# Altium PCB PCB1.PcbDoc (part 1 of 3)
Units mm, origin at the board's own origin, x right, y up, seen from the top; angles counter-clockwise.
Board outline 297.31 x 194.82 mm, 2 copper layers (Top Layer, Bottom Layer); 61 components, 34 nets, 159 pads, 65 vias.
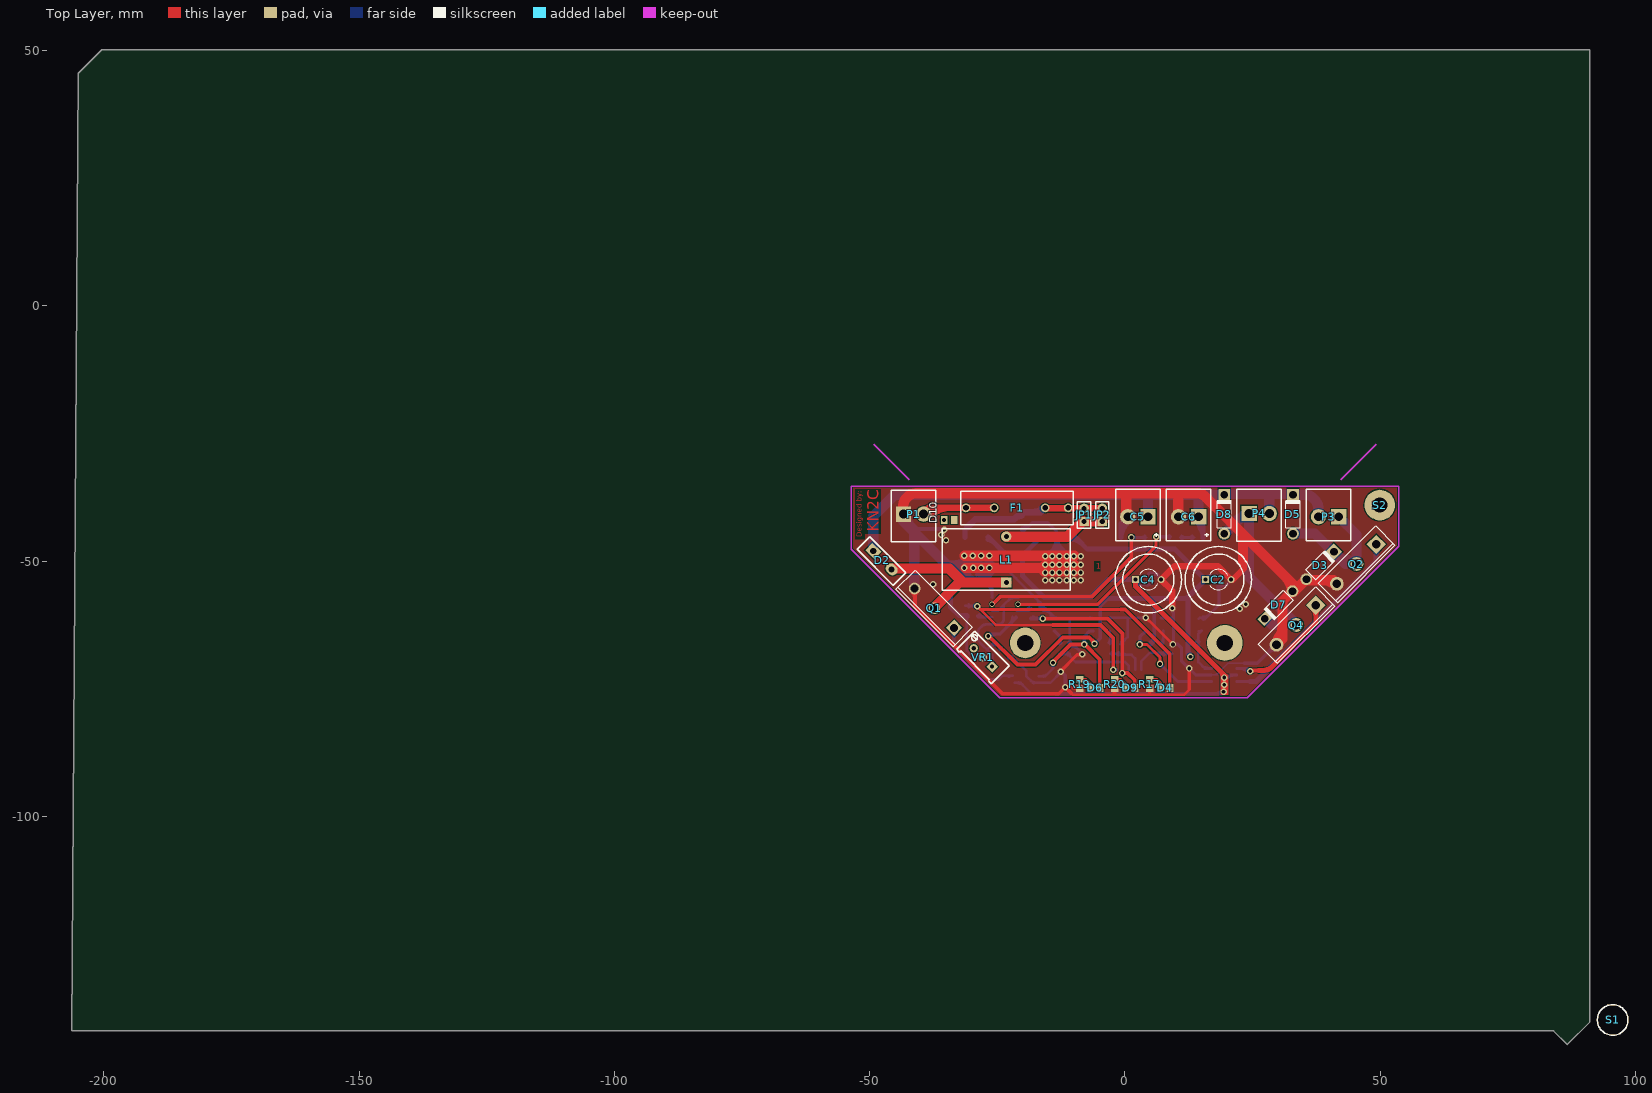
[diagram p0: Top Layer view]
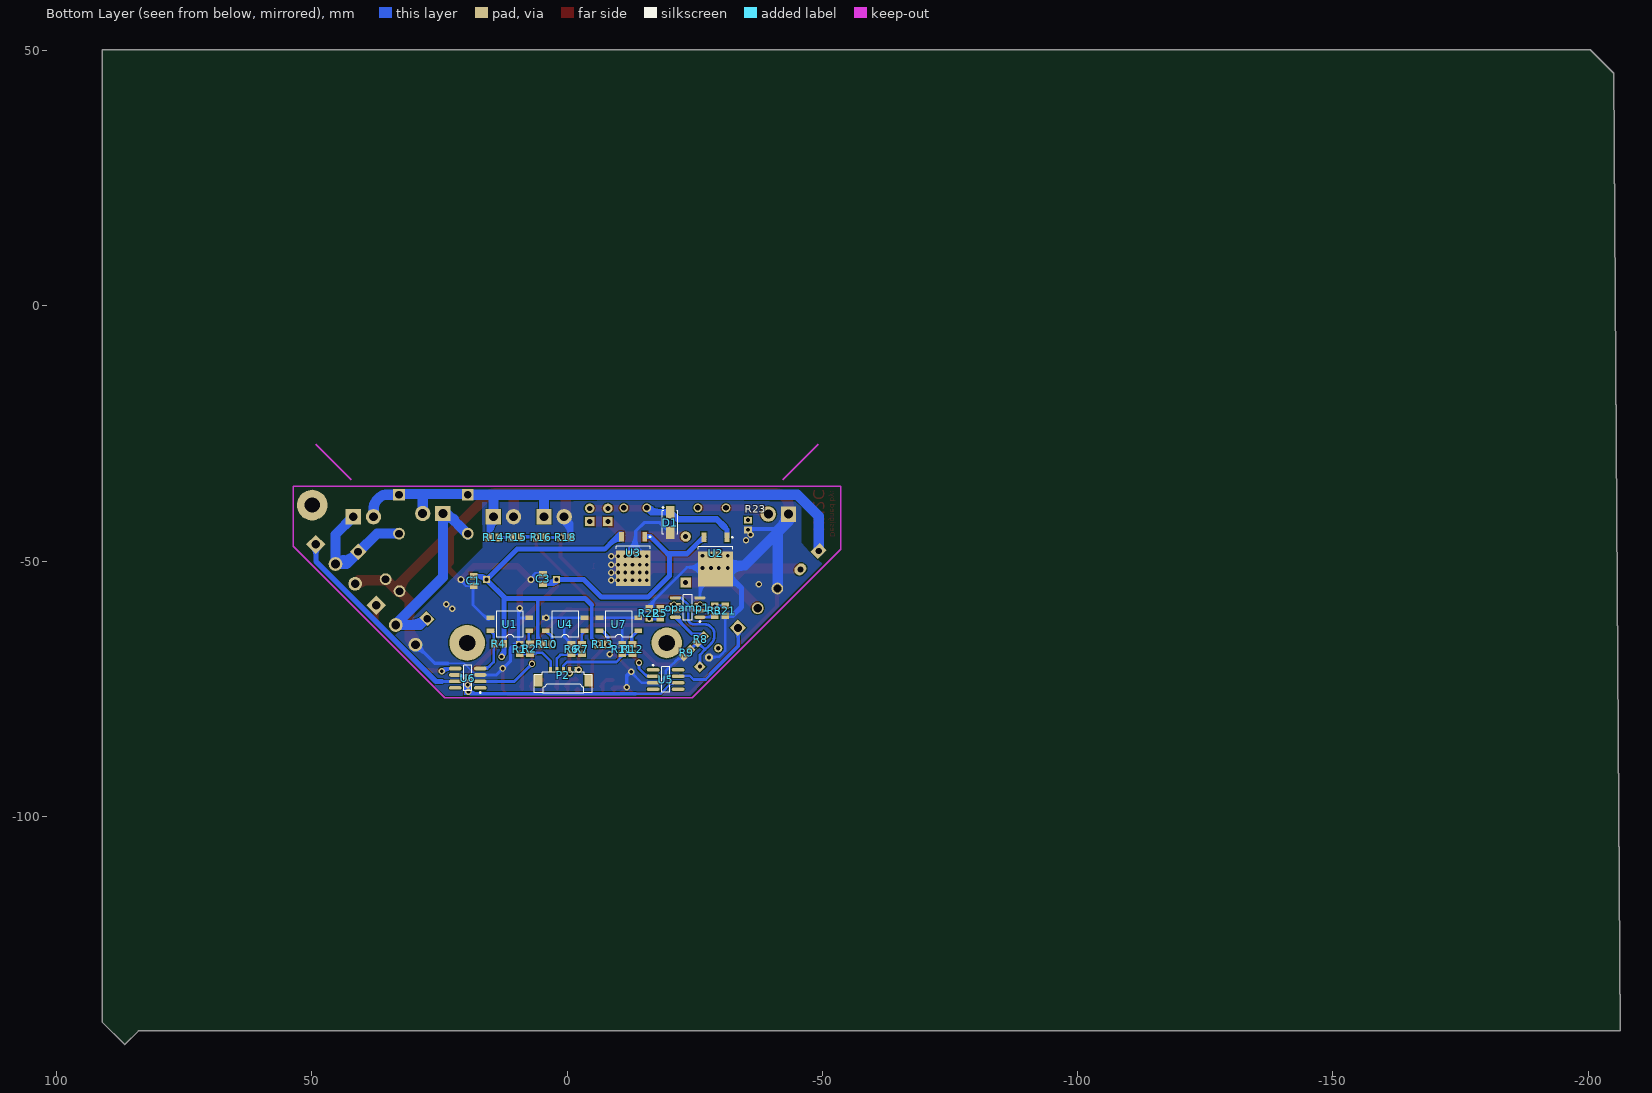
[diagram p1: Bottom Layer view, seen from below]

## Layer stack, top to bottom
Top Layer: signal copper 0.0356
Dielectric: dielectric 0.32, FR-4, Dk 4.8
Bottom Layer: signal copper 0.0356

## Board outline
-204.978,45.593 -200.406,50.165 91.059,50.165 91.059,-140.208 86.614,-144.653 83.947,-141.986 -206.248,-141.986

## Design rules (kind name [scope] priority, off if disabled: settings)
Clearance [All] p1: gap=0.2
FabricationTestpoint [(IsPad And (OnTopLayer Or OnBottomLayer))] p1: side=3 testpointundercomponent=TRUE minsize=1.016 maxsize=2.54 preferedsize=1.524 minholesize=0 maxholesize=1.016 preferedholesize=0.813 testpointgrid=0.025 allowsidetop=TRUE allowsidebottom=TRUE usegrid=TRUE gridtolerance=0
PlaneClearance [All] p1: clearance=0.5
PolygonConnect [All] p1: connectstyle=Direct reliefconductorwidth=0.254 reliefentries=4 polygonreliefangle="90 Angle" airgapwidth=0.254
RoutingVias [All] p1: holewidth=0.711 width=1.27 viastyle="Through Hole" minholewidth=0.5 minwidth=1 maxholewidth=0.711 maxwidth=1.27
SolderMaskExpansion [All] p1: expansion=0.102
Width Width_1 [All] p1: maxlimit=2 minlimit=2539.975 preferedwidth=1 toplayer_minwidth=0 bottomlayer_minwidth=0 minimp=50.000000 maximp=50.000000 favimp=50.000000
26 further rules are at their usual default settings.

## Components (designator, comment, footprint, x,y, rotation, side; value= is the part's Value field where it differs from the comment)
C1 "Cap_UP" 2012[0805] 18.288,-53.848 r90 bottom
C2 "Cap_El" EL_M 18.288,-53.594 r0 top
C3 "Cap_UP" 2012[0805] 4.699,-53.467 r270 bottom
C4 "Cap_El" EL_M 4.572,-53.594 r0 top
C5 "Cap_El_200V" CAP 2.54,-41.275 r270 top
C6 "Cap_El_200V" CAP 12.446,-41.275 r270 top
D1 "Diode" US1M -20.193,-42.418 r90 bottom
D2 "Diode_ShotKey" "TO-220A - duplicate" -47.498,-49.784 r45 top
D3 "Diode" DIO10.46-5.3X2.8#1 38.227,-50.8 r45 top
D4 "Diode" 2012[0805] 7.874,-74.803 r180 top
D5 "Diode" DIO10.46-5.3X2.8#1 32.893,-40.767 r90 top
D6 "Diode" 2012[0805] -5.842,-74.803 r180 top
D7 "Diode" DIO10.46-5.3X2.8#2 30.099,-58.547 r225 top
D8 "Diode" DIO10.46-5.3X2.8#1 19.431,-40.767 r90 top
D9 "Diode" 2012[0805] 1.016,-74.803 r180 top
D10 "Diode" 2012[0805] -34.417,-41.91 r180 top
F1 "Fuse" "fuse new" -32.639,-42.799 r0 top
JP1 "JUMPER" JPR -8.001,-40.894 r90 top
JP2 "JUMPER" JPR -4.445,-40.894 r90 top
L1 "Inductor" Mh2 -23.241,-49.657 r90 top
opamp1 "LM358" "8 pin SOIC_N" -23.622,-59.055 r0 bottom
P1 "Header 2B" BHDR1X2 -41.402,-40.767 r90 top
P2 "Header 5" "SHEADER 5" -1.778,-71.247 r0 bottom locked
P3 "Header 2B" BHDR1X2 39.878,-41.275 r270 top
P4 "Header 2B" BHDR1X2 26.289,-40.64 r90 top
Q1 "MOSFET-N" TO247#1 -37.338,-59.182 r135 top
Q2 "MOSFET-N" TO247#2 45.339,-50.546 r225 top
Q4 "MOSFET-N" TO247#2 33.528,-62.484 r225 top
R1 "Res" 2012[0805] 9.283,-67.183 r90 bottom
R2 "Res" 2012[0805] 7.251,-67.158 r270 bottom
R3 "Res" 2012[0805] -28.956,-59.69 r90 bottom
R4 "Res" 2012[0805] 13.335,-66.167 r180 bottom
R5 "Res" 2012[0805] -18.288,-60.198 r90 bottom
R6 "Res" 2012[0805] -0.889,-67.183 r90 bottom
R7 "Res" 2012[0805] -2.921,-67.183 r270 bottom
R8 "Res" 2012[0805] -26.162,-65.278 r135 bottom
R9 "Res" 2012[0805] -23.495,-67.945 r135 bottom
R10 "Res" 2012[0805] 3.937,-66.294 r0 bottom
R11 "Res" 2012[0805] -10.795,-67.183 r90 bottom
R12 "Res" 2012[0805] -12.827,-67.183 r270 bottom
R13 "Res" 2012[0805] -6.985,-66.294 r0 bottom
R14 "Res" 2012[0805] 14.351,-45.339 r180 bottom
R15 "Res" 2012[0805] 9.906,-45.339 r0 bottom
R16 "Res" 2012[0805] 5.08,-45.339 r0 bottom
R17 "Res" 2012[0805] 4.826,-74.041 r90 top
R18 "Res" 2012[0805] 0.254,-45.339 r0 bottom
R19 "Res" 2012[0805] -8.89,-74.041 r90 top
R20 "Res" 2012[0805] -2.032,-74.041 r90 top
R21 "Res" 2012[0805] -30.988,-59.69 r270 bottom
R22 "Res" 2012[0805] -16.129,-60.198 r90 bottom
R23 "Res" 2012[0805] -35.433,-42.926 r90 bottom
S1 "Screw Hole" "Screw Holw 3-6 mm"#1 95.504,-139.827 r0 top
S2 "Screw Hole" "Screw Holw 3-6 mm"#2 55.626,-42.037 r180 top
U1 "OptoCoupler" opto_smd 11.176,-62.357 r180 bottom
U2 "7812" D-PACK -29.083,-49.657 r270 bottom
U3 "7805" D-PACK -12.954,-49.53 r270 bottom
U4 "OptoCoupler" opto_smd 0.381,-62.357 r180 bottom locked
U5 "TC4428" SO-8_M -19.304,-73.152 r180 bottom
U6 "TC4429" SO-8_M 19.431,-72.898 r0 bottom
U7 "OptoCoupler" opto_smd -10.16,-62.357 r180 bottom locked
VR1 "Res Tap" MULTITURN -27.813,-68.834 r135 top

## Footprints (in the part's own frame and the unit in brackets; to place one, negate y for a bottom-side part, rotate by r counter-clockwise, add the part's x,y. Pads: shape width x height; smd on the part's side, far side on the other; paste and mask are expansions set on the pad)
"8 pin SOIC_N" [mm] "8-Pin Small Outline Integrated Circuit 1.27 mm Pitch, IPC Medium Density"
  oval 2.2x0.6 smd: 1(-2.4,1.905) 2(-2.4,0.635) 3(-2.4,-0.635) 4(-2.4,-1.905) 5(2.4,-1.905) 6(2.4,-0.635) 7(2.4,0.635) 8(2.4,1.905)
  silkscreen extent -2.52,-2.5 0.9,2.88, body extent -1.95,-2.45 1.95,2.45, height 1.91
2012[0805] [mm] "Chip Resistor; Body 2.0 x 1.3 mm (LxW typ)"
  rect 1.3x1.5 smd: 1(-0.95,0) 2(0.95,0)
  body extent -1.22,-0.75 1.28,0.75, height 0.5
BHDR1X2 [mm]
  rect 3x3 hole 1.75: 1(0,1.98)
  round 3 hole 1.75: 2(0,-1.98)
  silkscreen extent -5.4,-4.36 4.7,4.36, body extent -5.53,-4.47 4.77,4.47, height 12.5
CAP [mm]
  rect 3x3 hole 1.75: 1(0,1.98)
  round 3 hole 1.75: 2(0,-1.98)
  silkscreen extent -5.4,-4.36 4.7,4.36, body extent -5.53,-4.5 4.82,4.47, height 12.5
D-PACK [mm] "D-PAK, 3-Pads, Body 6.2x6.7mm (max), IPC Medium Density"
  rect 1.9x0.95 smd: 1(-4.35,2.28) 3(-4.35,-2.28)
  rect 6.9x6.8 smd: 4(1.85,0)
  silkscreen extent -4.47,-3.35 -2,3.43, body extent -2.5,-3.35 3.7,3.35, height 2.38
DIO10.46-5.3X2.8#1 [mm]
  round 2.3 hole 1.5: 1(-3.81,0)
  rect 2.3x2.3 hole 1.5: 2(3.81,0)
  silkscreen extent -2.65,-1.4 2.75,1.4, body extent -2.75,-1.5 2.75,1.5, height 3.3
DIO10.46-5.3X2.8#2 [mm]
  round 2.3 hole 1.5: 1(-3.81,0)
  rect 2.3x1.9 hole 1.5: 2(3.81,0)
  silkscreen extent -2.65,-1.4 2.75,1.4, body extent -2.75,-1.5 2.75,1.5, height 3.3
EL_M [mm]
  rect 1.35x1.35 hole 0.8: 1(-2.5,0)
  round 1.35 hole 0.8: 2(2.5,0)
  silkscreen extent -6.5,-6.5 6.5,6.5, body extent -6.48,-6.5 6.5,6.5, height 21
"fuse new" [mm]
  round 1.7 hole 1.1: 0(1.5,3.25) 1(7,3.25) 2(17,3.25) 3(21.5,3.25)
  silkscreen extent 0.48,0 22.5,6.5
JPR [mm] "Jumper"
  rect 1.8x1.9 hole 1: 1(-1.3,0)
  oval 1.8x1.9 hole 1: 2(1.27,0)
  silkscreen extent -2.6,-1.3 2.6,1.3, body extent -2.58,-1.3 2.58,1.3, height 9.6
Mh2 [mm]
  rect 2x2 hole 1: 1(-4.5,0)
  round 2 hole 1: 2(4.5,0)
  silkscreen extent -6,-12.5 6,12.5, body extent -5.95,-12.45 5.92,12.52, height 4
MULTITURN [mm]
  rect 1.6x1.6 hole 0.8: 1(-2.54,0)
  round 1.6 hole 0.8: 2(0,0) 3(2.54,0)
  silkscreen extent -4.75,-2.5 4.75,2.5, body extent -4.77,-2.5 4.72,2.53, height 4
opto_smd [mm]
  rect 1.5x0.9 smd: 1(3.81,-1.27) 2(3.81,1.27) 3(-3.81,1.27) 4(-3.81,-1.27)
  silkscreen extent -2.65,-2.55 2.65,2.55, body extent -2.75,-2.65 2.75,2.68, height 6.8
"Screw Holw 3-6 mm"#1 [mm]
  round 0 hole 3: 0(-0.025,0)
  silkscreen extent -3,-3 3,3
"Screw Holw 3-6 mm"#2 [mm]
  round 6 hole 3: 0(5.715,-3.048)
"SHEADER 5" [mm] "SMD Header 1.27mm"
  rect 1.6x2.4 smd: 0(-2.425,2.075) 0(7.425,2.075)
  rect 0.6x1 smd: 1(0,0) 2(1.25,0) 3(2.5,0) 4(3.75,0) 5(5,0)
  silkscreen extent -3.2,0.5 8.2,4.62, body extent -3.2,-0.12 8.2,4.65, height 3.5
SO-8_M [mm] "8-Pin Small Outline Integrated Circuit 1.27 mm Pitch, IPC Low Density"
  oval 2.5x0.7 smd: 1(-2.45,1.905) 2(-2.45,0.635) 3(-2.45,-0.635) 4(-2.45,-1.905) 5(2.45,-1.905) 6(2.45,-0.635) 7(2.45,0.635) 8(2.45,1.905)
  silkscreen extent -2.58,-2.5 0.8,2.93, body extent -2,-2.5 2,2.5, height 1.75
TO247#1 [mm] "SIP with Mounting Hole; 3 Leads; Body 20 x 15.6 x 5 mm (typ); Pitch 5.45 mm"
  rect 2.3x2.3 hole 1.6: 1(-5.45,0)
  round 2.3 hole 1.6: 2(0,0) 3(5.45,0)
  silkscreen extent -7.95,-2.6 7.95,2.7
TO247#2 [mm] "SIP with Mounting Hole; 3 Leads; Body 20 x 15.6 x 5 mm (typ); Pitch 5.45 mm"
  rect 2.7x2.7 hole 1.7: 1(-5.45,0)
  round 2.7 hole 1.7: 2(0,0) 3(5.45,0)
  silkscreen extent -7.95,-2.6 7.95,2.7
"TO-220A - duplicate" [mm]
  rect 2x2.5 hole 1.2: 1(0,2.54)
  oval 2x2.5 hole 1.2: 2(0,-2.54)
  silkscreen extent -2,-5 1.5,5
US1M [mm] "Molded Diode, 2-Leads, Body 4.3x2.6mm, IPC Medium Density"
  rect 2.5x1.7 smd: 1(-2,0) 2(2,0)
  silkscreen extent -2.3,-1.5 3.07,1.53, body extent -2.3,-1.46 2.3,1.46, height 2.3

## Part data
C1 C2 C3 C4 C5 C6: "Capacitor"
D1 D2 D3 D4 D5 D6 D7 D8 D9 D10: "1 Amp General Purpose Rectifier"
opamp1: library part 7667, "Dual MOSFET Driver"
P2: "Header, 5-Pin"
Q1 Q2 Q4: "N-Channel MOSFET"
R1 R2 R3 R4 R5 R6 R7 R8 R9 R10 R11 R12 R13 R14 R15 R16 R17 R18 R19 R20 R21 R22 R23: "Semiconductor Resistor"
U1 U4 U7: library part TLP521
U5: "Dual MOSFET Driver"
U6: library part TC4428, "Dual MOSFET Driver"
VR1: "Tapped Resistor"

## Free pads (board coordinates)
  round 7 hole 3.2: 1(19.558,-65.989)
  round 6 hole 3.2: 2(-19.558,-65.989)

## Via types
v1: diameter 1.27, hole 0.711, Top Layer to Bottom Layer, 63 vias
v2: diameter 1.016, hole 0.711, Top Layer to Bottom Layer, 2 vias

## Nets (pads, with @x,y where several pads share a name; then routed paths per layer and width w, separated by ;. In a path a pad name is that pad's centre, name@x,y a point inside that pad or via, vN(x,y) a via of type N, cw(c..) or ccw(c..) an arc to the next point about the centre after c; other vN are vias at no path point)
+12: C3.2 C4.1 U2.3 U3.1 U5.6 U6.6 | length 167.6
  Top Layer w1: C4.1@2.072,-53.594 2.072,-54.904 v1@19.558,-72.39 ; 19.139,-72.186 ccw(c19.884,-71.986) v1@19.499,-72.654 ; 18.841,-71.673 cw(c17.744,-72.771) 19.296,-72.771 ccw(c17.744,-72.771) 18.841,-71.673
  Bottom Layer w0.508: U5.6@-21.59,-73.787 -20.447,-73.787 -18.288,-75.946 -13.468,-75.946 -13.462,-75.952 ; v1@19.685,-73.279 U6.6@20.701,-72.263 ; U6.6@21.881,-72.263 U6.6@20.701,-72.263 ; U5.6@-20.854,-73.883 cw(c-20.854,-75.097) -19.995,-74.239 ; U5.6@-20.854,-73.883 cw(c-20.854,-75.097) -19.995,-74.239 ; U5.6@-20.854,-73.883 cw(c-20.854,-75.097) -19.995,-74.239 ; U5.6@-20.771,-73.739 ccw(c-20.296,-73.465) -20.438,-73.994 ; U5.6@-20.771,-73.739 ccw(c-20.296,-73.465) -20.438,-73.994 ; U5.6@-20.771,-73.739 ccw(c-20.296,-73.465) -20.438,-73.994 ; 20.339,-72.625 cw(c20.981,-73.267) U6.6@20.981,-72.359 ; 20.339,-72.625 cw(c20.981,-73.267) U6.6@20.981,-72.359 ; 20.339,-72.625 cw(c20.981,-73.267) U6.6@20.981,-72.359 ; 20.565,-72.47 ccw(c20.423,-71.941) U6.6@20.898,-72.215 ; 20.565,-72.47 ccw(c20.423,-71.941) U6.6@20.898,-72.215 ; 20.565,-72.47 ccw(c20.423,-71.941) U6.6@20.898,-72.215 ; U6.6@20.701,-72.263 cw(c20.038,-71.6) 19.606,-72.433 ccw(c20.038,-71.6) U6.6@20.701,-72.263 ; v1@19.373,-72.884 ccw(c19.703,-72.247) 20.21,-72.754 cw(c19.703,-72.247) v1@19.373,-72.884
  Bottom Layer w0.75: -13.462,-75.952 18.917,-75.952 v1@19.685,-75.184 ; C4.1@2.032,-53.594 2.855,-54.417 C3.2@4.699,-54.417 ; 18.372,-75.813 cw(c18.794,-76.544) v1@19.184,-75.796 ; C4.1@1.747,-53.905 ccw(c2.945,-52.76) 2.945,-54.417 ; C4.1@1.747,-53.905 ccw(c2.945,-52.76) 2.945,-54.417 ; C4.1@1.747,-53.905 ccw(c2.945,-52.76) 2.945,-54.417 ; C4.1@2.143,-53.885 cw(c2.549,-55.55) 3.439,-54.086 ; C4.1@2.143,-53.885 cw(c2.549,-55.55) 3.439,-54.086 ; C4.1@2.143,-53.885 cw(c2.549,-55.55) 3.439,-54.086 ; C4.1@2.289,-53.387 ccw(c4.699,-51.083) C3.2@4.699,-54.417 ; C4.1@2.289,-53.387 ccw(c4.699,-51.083) C3.2@4.699,-54.417 ; C4.1@2.289,-53.387 ccw(c4.699,-51.083) C3.2@4.699,-54.417 ; C4.1@2.361,-53.676 ccw(c3.038,-53.867) 2.672,-54.468 ; C4.1@2.361,-53.676 ccw(c3.038,-53.867) 2.672,-54.468 ; C4.1@2.361,-53.676 ccw(c3.038,-53.867) 2.672,-54.468 ; C4.1@2.372,-53.594 ccw(c3.193,-53.594) C4.1@2.612,-54.174 ; C4.1@2.372,-53.594 ccw(c3.193,-53.594) C4.1@2.612,-54.174 ; C4.1@2.372,-53.594 ccw(c3.193,-53.594) C4.1@2.612,-54.174 ; 3.904,-54.204 cw(c3.709,-54.931) C3.2@4.361,-54.554 ; 3.904,-54.204 cw(c3.709,-54.931) C3.2@4.361,-54.554 ; 3.904,-54.204 cw(c3.709,-54.931) C3.2@4.361,-54.554 ; 3.904,-54.204 cw(c3.709,-54.931) C3.2@4.361,-54.554 ; 3.904,-54.204 cw(c3.709,-54.931) C3.2@4.361,-54.554 ; 3.904,-54.204 cw(c3.709,-54.931) C3.2@4.361,-54.554 ; 3.935,-54.417 cw(c3.935,-55.081) C3.2@4.405,-54.611 ; 3.935,-54.417 ccw(c3.935,-53.753) C3.2@4.405,-54.223 ; 3.935,-54.417 cw(c3.935,-55.081) C3.2@4.405,-54.611 ; 3.935,-54.417 ccw(c3.935,-53.753) C3.2@4.405,-54.223 ; 3.935,-54.417 cw(c3.935,-55.081) C3.2@4.405,-54.611 ; 3.935,-54.417 ccw(c3.935,-53.753) C3.2@4.405,-54.223 ; 17.742,-75.952 ccw(c17.742,-74.003) 19.12,-75.381 cw(c17.742,-74.003) 17.742,-75.952
  Bottom Layer w1: U2.3@-26.797,-45.212 -23.495,-48.514 -20.32,-48.514 ; U3.1@-15.24,-45.339 -15.399,-45.18 -16.377,-45.18 -19.711,-48.514 -20.32,-48.514 ; C4.1@2.072,-53.594 2.032,-53.594 -3.302,-53.594 -6.731,-57.023 -15.875,-57.023 -20.066,-52.832 -20.066,-48.768 -20.32,-48.514 ; U2.3@-26.803,-45.757 cw(c-26.803,-47.087) -25.862,-46.147 ; U2.3@-26.803,-45.757 cw(c-26.803,-47.087) -25.862,-46.147 ; U2.3@-26.803,-45.757 cw(c-26.803,-47.087) -25.862,-46.147
  other v1: 19.304,-75.565 19.431,-74.168 19.431,-72.771
D1-OUT: Q1.1 U5.7 | length 28.5
  Bottom Layer w0.508: -28.177,-72.119 -27.145,-73.152 -24.765,-73.152 -24.003,-72.39 U5.7@-22.008,-72.39 ; -23.192,-72.39 cw(c-23.192,-73.055) U5.7@-22.722,-72.585 ; -23.192,-72.39 cw(c-23.192,-73.055) U5.7@-22.722,-72.585 ; -23.192,-72.39 cw(c-23.192,-73.055) U5.7@-22.722,-72.585
  Bottom Layer w0.75: Q1.1@-33.528,-63.119 -33.528,-66.598 -28.092,-72.034 ; Q1.1@-34.032,-63.584 cw(c-35.25,-64.801) -33.528,-64.801 ; Q1.1@-34.032,-63.584 cw(c-35.25,-64.801) -33.528,-64.801 ; Q1.1@-34.032,-63.584 cw(c-35.25,-64.801) -33.528,-64.801 ; -33.528,-65.012 cw(c-31.508,-65.012) Q1.1@-32.936,-63.584 ; -33.528,-65.012 cw(c-31.508,-65.012) Q1.1@-32.936,-63.584 ; -33.528,-65.012 cw(c-31.508,-65.012) Q1.1@-32.936,-63.584
D2-OUT: Q2.1 U6.7 | length 49.8
  Bottom Layer w0.508: U6.7@21.881,-73.533 24.384,-73.533
  Bottom Layer w1: 24.511,-73.533 25.654,-73.533 49.149,-50.038 Q2.1@49.149,-46.736 ; Q2.1@48.592,-47.293 cw(c47.246,-48.639) 49.149,-48.639 ; Q2.1@48.592,-47.293 cw(c47.246,-48.639) 49.149,-48.639 ; Q2.1@48.592,-47.293 cw(c47.246,-48.639) 49.149,-48.639 ; 49.149,-48.85 cw(c51.35,-48.85) Q2.1@49.794,-47.293 ; 49.149,-48.85 cw(c51.35,-48.85) Q2.1@49.794,-47.293 ; 49.149,-48.85 cw(c51.35,-48.85) Q2.1@49.794,-47.293
D3-OUT: Q4.1 U6.5 | length 41.9
  Top Layer w0.75: v1@24.384,-71.374 26.162,-71.374 ; v1@24.695,-71.685 cw(c25.445,-72.435) 25.445,-71.374 ccw(c25.445,-72.435) v1@24.695,-71.685
  Top Layer w1: 26.162,-71.374 27.015,-71.374 ccw(c27.015,-68.834) 28.285,-71.034 ccw(c27.015,-68.834) 28.811,-70.63 37.382,-62.059 Q4.1@37.382,-58.63 ; Q4.1@36.781,-59.231 cw(c35.33,-60.682) 37.382,-60.682 ; Q4.1@36.781,-59.231 cw(c35.33,-60.682) 37.382,-60.682 ; Q4.1@36.781,-59.231 cw(c35.33,-60.682) 37.382,-60.682 ; 37.382,-60.682 cw(c39.434,-60.682) Q4.1@37.983,-59.231 ; 37.382,-60.682 cw(c39.434,-60.682) Q4.1@37.983,-59.231 ; 37.382,-60.682 cw(c39.434,-60.682) Q4.1@37.983,-59.231
  Bottom Layer w0.508: U6.5@21.881,-70.993 24.003,-70.993 v1(24.511,-71.501) ; 23.236,-71.19 ccw(c23.762,-70.278) v1@24.312,-71.176 ; U6.5@22.365,-70.993 cw(c22.365,-73.647) 24.242,-71.77 ccw(c22.365,-73.647) U6.5@22.365,-70.993 ; 23.591,-70.993 cw(c23.591,-72.421) 24.601,-71.411 ccw(c23.591,-72.421) 23.591,-70.993